# Altium PCB v0.2.PcbDoc
Units mil, origin at the board's own origin, x right, y up, seen from the top; angles counter-clockwise.
Board outline 2200 x 1320 mil, 4 copper layers (Top Layer, Signal Layer 1, Signal Layer 2, Bottom Layer), stack 30.634 mil thick; 74 components, 39 nets, 202 pads, 29 vias.
Unrouted connection lines stored in the file: 40.
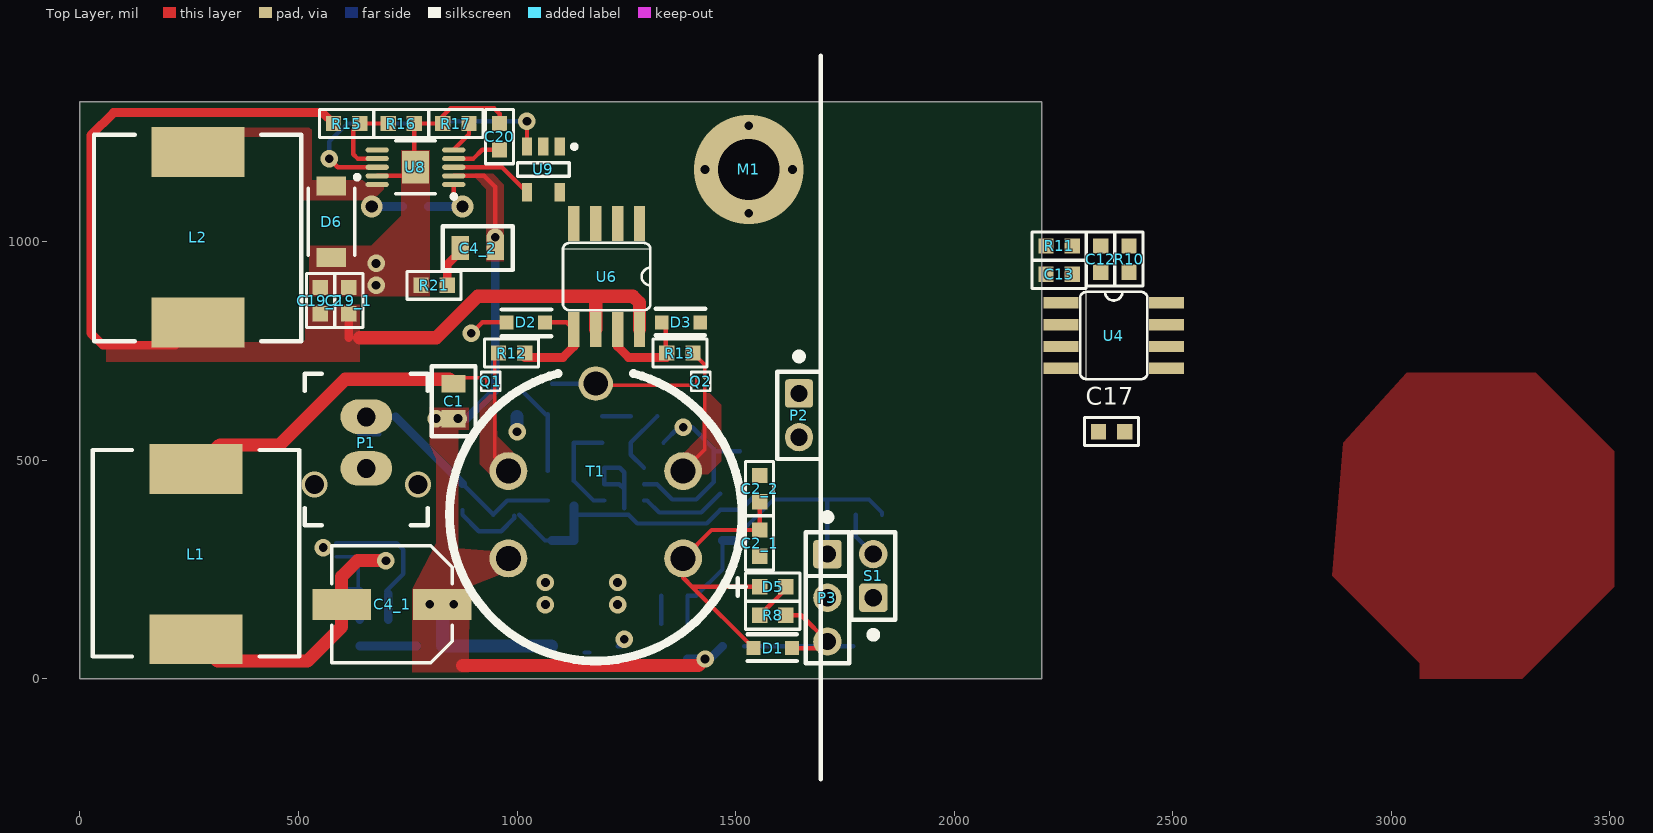
[diagram p0: Top Layer view]
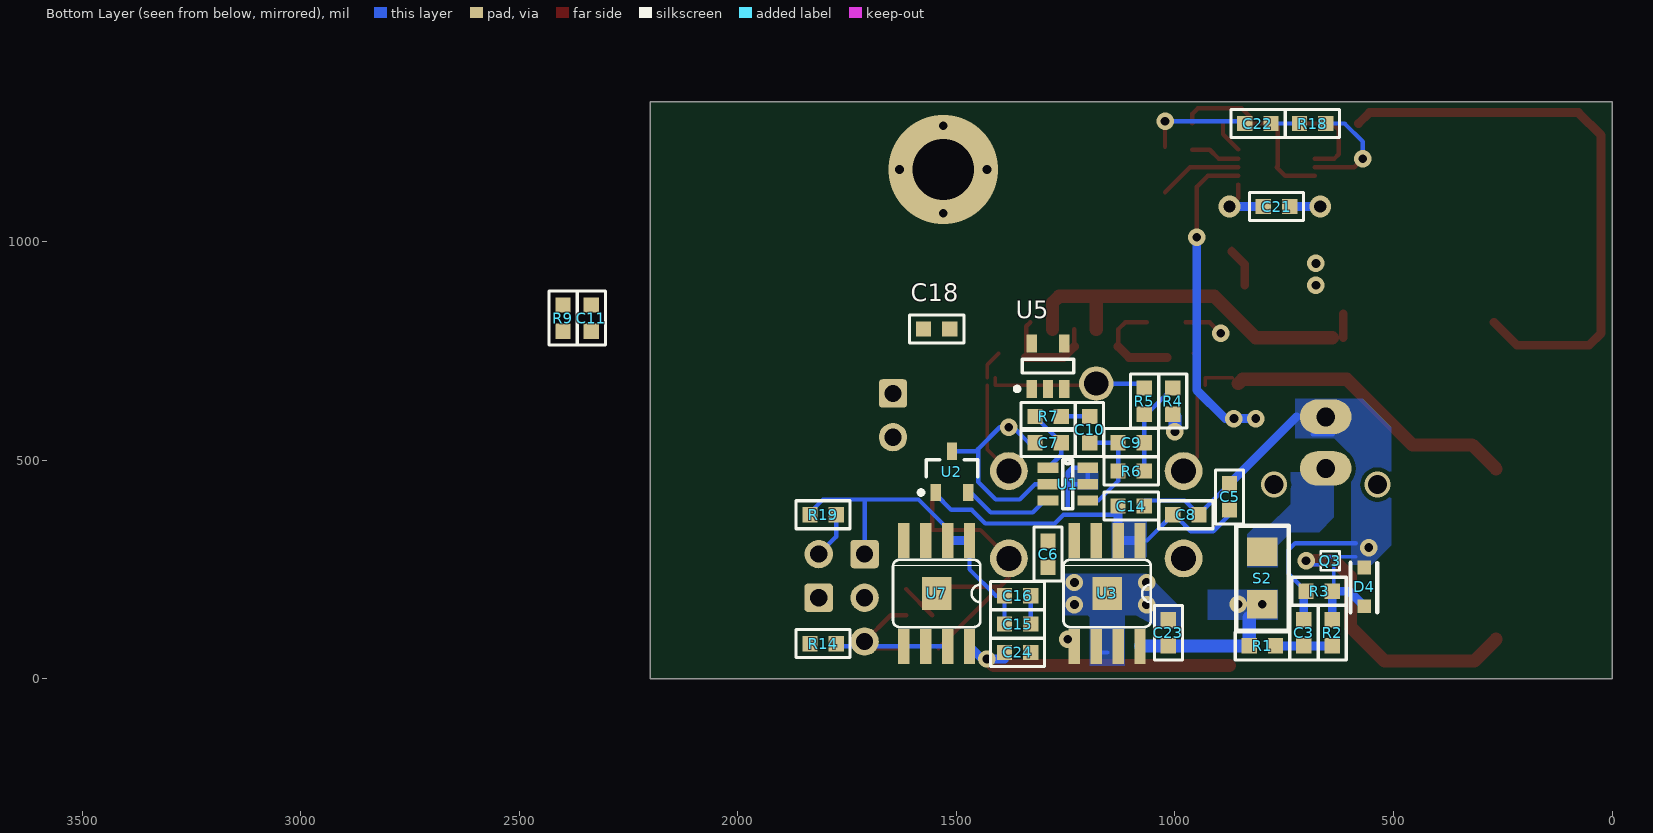
[diagram p1: Bottom Layer view, seen from below]
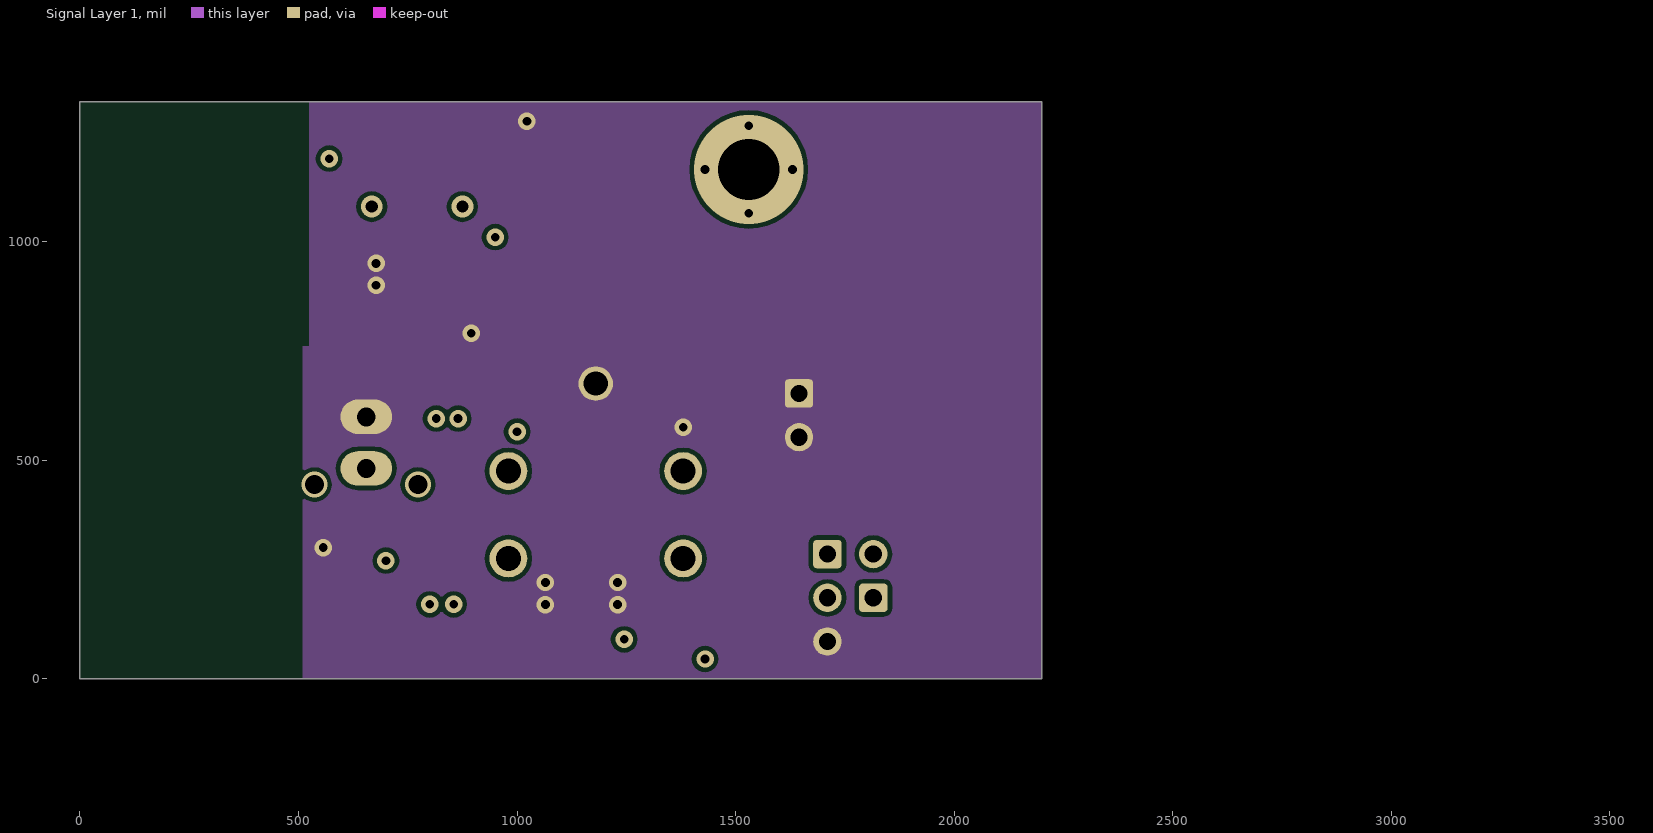
[diagram p2: Signal Layer 1]
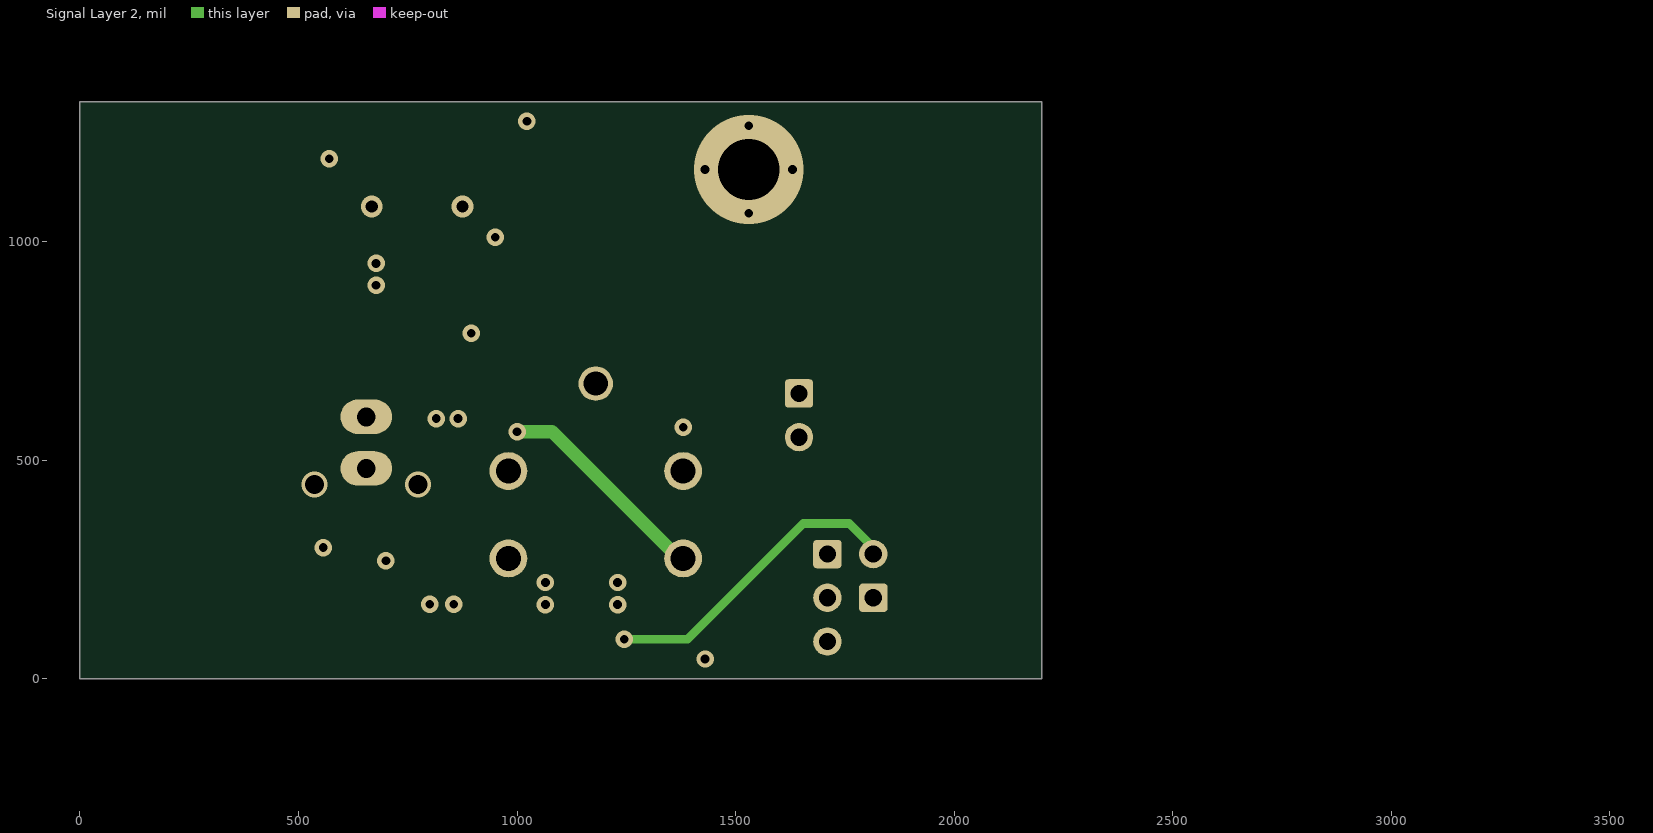
[diagram p3: Signal Layer 2]

## Layer stack, top to bottom
Top Solder: solder mask 0.4, Solder Resist, Dk 3.5
Top Layer: signal copper 1.4
Dielectric 1: core 10, FR-4, Dk 4.2
Signal Layer 1: signal copper 1.417
Dielectric 3: prepreg 5, Dk 4.2
Signal Layer 2: signal copper 1.417
Dielectric 2: core 10, Dk 4.2
Bottom Layer: signal copper 1.4
Bottom Solder: solder mask 0.4, Solder Resist, Dk 3.5

## Board outline
0,0 0,1320 2200,1320 2200,0

## Design rules (kind name [scope] priority, off if disabled: settings)
Clearance [All] p1: gap=10 ignorepadtopadclearanceinfootprint=FALSE except(0: Arc-Hole Track-Hole SMDPad-Hole THPad-Hole Via-Hole Fill-Hole Poly-Hole Region-Hole Text-Hole)
PolygonConnect [All] p1: connectstyle=Direct reliefconductorwidth=10 reliefentries=4 polygonreliefangle="90 Angle" airgapwidth=10
RoutingVias [All] p1: holewidth=28 width=50 viastyle="Through Hole" minholewidth=28 minwidth=50 maxholewidth=28 maxwidth=50
SilkToSilkClearance [All] p1 off: silktosilkclearance=10
SolderMaskExpansion [All] p1: expansion=4
Width [All] p1: maxlimit=50 minlimit=8 preferedwidth=10 midlayer1_minwidth=10 midlayer2_minwidth=10 minimp=50.000000 maximp=50.000000 favimp=50.000000
29 further rules are at their usual default settings.

## Components (designator, comment, footprint, x,y, rotation, side; value= is the part's Value field where it differs from the comment)
C1 "TriCap" TRICAP_0805 855,635 r270 top locked value=1u
C2_1 "TriCap" TRICAP_0603 1555,310 r90 top value=10u
C2_2 "TriCap" TRICAP_0603 1555,435 r270 top value=10u
C3 "Cap" SMD0603_CAP 705,105 r270 bottom value=100n
C4_1 "Cap" CAP_RADIAL_D 713.86,170 r180 top value=10u
C4_2 "TriCap" tricap_0805 910,985 r0 top value=1u
C5 "Cap" SMD0603_CAP 875,415.75 r90 bottom value=2.2u
C6 "Cap" SMD0603_CAP 1290.28,285 r270 bottom value=2.2u
C7 "Cap" SMD0603_CAP 1290.28,540 r0 bottom value=330p
C8 "Cap" SMD0603_CAP 975,375 r180 bottom value=10n
C9 "Cap" SMD0603_CAP 1100,540 r0 bottom value=500p
C10 "Cap" SMD0603_CAP 1195,570 r270 bottom value=440p
C11 "Cap" SMD0603_CAP 2335,825 r270 bottom value=330p
C12 "Cap" SMD0603_CAP 2335,960 r90 top value=330p
C13 "Cap" SMD0603_CAP 2240,925 r0 top value=1n
C14 "Cap" SMD0603_CAP 1100,395 r180 bottom value=10n
C15 "Cap" SMD0603_CAP 1360,125 r180 bottom value=2.2u
C16 "Cap" SMD0603_CAP 1360,190 r180 bottom value=10n
C17 "Cap" SMD0603_CAP 2360,565 r0 top value=10n
C18 "Cap" SMD0603_CAP 1545,800 r180 bottom value=10n
C19_1 "TriCap" TRICAP_0603 615,865 r270 top value=10u
C19_2 "TriCap" TRICAP_0603 550,865 r270 top value=10u
C20 "Cap" SMD0603_CAP 960,1240 r90 top value=100n
C21 "Cap" SMD0603_CAP 767.6,1080 r180 bottom value=100n
C22 "Cap" SMD0603_CAP 810,1270 r0 bottom value=4.7n
C23 "Cap" SMD0603_cap 1015,105 r270 bottom value=100n
C24 "Cap" SMD0603_cap 1360,60 r0 bottom value=100n
D1 "Zener" SOD-323F 1585,70 r180 top
D2 "Zener" SOD-323F 1020,815 r0 top
D3 "Zener" SOD-323F 1375,815.12 r180 top
D4 "Zener" SOD-323F 566.89,210 r270 bottom
D5 "LED" "SMD0603 POLARIZED" 1585,210 r0 top
D6 "Shottky" SOD-128 575,1045 r270 top
L1 "Inductor" NONSTANDARD_10UH 265,285 r180 top value=10u
L2 "Inductor" NONSTANDARD_68UH 270,1010 r0 top value=68u
M1 "MountHole" MOUNTHOLE_M3 1530,1165 r0 top
P1 "Microfit 2x1" "MICROFIT 2X1" 655,540 r180 top
P2 "Header" "HEADER 2X1" 1645,652.5 r270 top
P3 "Header" "HEADER 3X1" 1710,285 r270 top
Q1 "GaN PowerFET" "GaN Bumped Die" 940,680 r270 top
Q2 "GaN PowerFET" "GAN BUMPED DIE" 1420,680 r270 top
Q3 "GaN PowerFET" "GaN Bumped Die" 645,270 r0 bottom
R1 "Res" SMD0603 800,75 r0 bottom value=200k
R2 "Res" SMD0603 640,105 r270 bottom value=200k
R3 "Res" SMD0603 670,200 r0 bottom value=23.7k
R4 "Res" SMD0603 1005,635 r90 bottom value=73.2k
R5 "Res" SMD0603 1070,635 r90 bottom value=23.7k
R6 "Res" SMD0603 1100,475 r180 bottom value=1M
R7 "Res" SMD0603 1290.28,600 r180 bottom value=200k
R8 "Res" SMD0603 1585,145 r0 top value=2.2k
R9 "Res" SMD0603 2400,825 r90 bottom value=21k
R10 "Res" SMD0603 2400,960 r90 top value=1k
R11 "Res" SMD0603 2240,990 r180 top value=3.3k
R12 "Res" SMD0603 987.5,745 r180 top value=100
R13 "Res" SMD0603 1372.5,745 r0 top value=100
R14 "Res" SMD0603 1805,80 r180 bottom value=0
R15 "Res" SMD0603 610,1270 r180 top value=200k
R16 "Res" SMD0603 735,1270 r180 top value=36k
R17 "Res" SMD0603 860,1270 r0 top value=200k
R18 "Res" SMD0603 685,1270 r180 bottom value=22k
R19 "Res" SMD0603 1805,375 r180 bottom value=200k
R21 "Res" SMD0603 810,900 r180 top value=1
S1 "Header" "Header 2x1" 1815,185 r90 top
S2 "Fuse_SMD" smd1206 800,230 r270 bottom
T1 "Transformer" P1408 1180,375 r90 top locked
U1 "OPA835" SOT23-6L 1245,445 r180 bottom
U2 "MAX6101" SOT23 1510,473.13 r90 bottom
U3 "RT9068" SOIC-8_PAD 1155,195 r0 bottom
U4 "555" SOIC8 2365,785 r270 top
U5 "MCP6541U" SOT23-5LEAD 1290.28,715 r90 bottom
U6 "LM5110-3M" SOIC8 1205,920 r180 top
U7 "RT9068" SOIC-8_PAD 1545,195 r0 bottom
U8 "TPS54260" MSSOP-10 767.6,1170 r180 top
U9 "NC7SZ04" SOT23-5LEAD 1060,1165 r270 top

## Footprints (in the part's own frame and the unit in brackets; to place one, negate y for a bottom-side part, rotate by r counter-clockwise, add the part's x,y. Pads: shape width x height; smd on the part's side, far side on the other; paste and mask are expansions set on the pad)
CAP_RADIAL_D [mm] "Aluminum Electrolytic Capacitor, Body 7.00x6.60x6.10mm, IPC Low Density"
  rect 3.4x1.8 smd: 1(-2.925,0) 2(2.925,0)
  silkscreen extent -3.5,-3.4 3.5,3.4, body extent -3.87,-3.4 3.88,3.4, height 6.1
"GaN Bumped Die" [mm] "4-Lead"
  round 0.21 smd: D(0.225,0.225) G(-0.225,0.225) S(-0.225,-0.225) S(0.225,-0.225)
  silkscreen extent -0.55,-0.55 0.55,0.55, body extent -0.71,-0.55 0.54,0.55, height 1.35
"GAN BUMPED DIE" [mm] "4-Lead"
  round 0.21 smd: D(0.225,0.225) G(-0.225,0.225) S(-0.225,-0.225) S(0.225,-0.225)
  silkscreen extent -0.55,-0.55 0.55,0.55, body extent -0.71,-0.55 0.54,0.55, height 1.35
"HEADER 2X1" [mil] "PinHeader 1x2 TH Pitch 2.54mm"
  rrect25% 65x65 hole 39.37: 1(0,0)
  round 65 hole 39.37: 2(100,0)
  silkscreen extent -91,-50 150,50, body extent -50,-50 150,50, height 374
"Header 2x1" [mil] "PinHeader 1x2 TH Pitch 2.54mm"
  rrect25% 65x65 hole 39.37: 1(0,0)
  round 65 hole 39.37: 2(100,0)
  silkscreen extent -91,-50 150,50, body extent -50,-50 150,50, height 374
"HEADER 3X1" [mil] "PinHeader 1x3 TH Pitch 2.54mm"
  rrect25% 65x65 hole 39.37: 1(0,0)
  round 65 hole 39.37: 2(100,0) 3(200,0)
  silkscreen extent -91,-50 250,50, body extent -50,-50 250,50, height 374
"MICROFIT 2X1" [mm]
  oval 3x2 hole 1.1: 1(0,1.5) 2(0,-1.5)
  silkscreen extent -3.58,-4 3.58,4.8, body extent -3.57,-3.97 3.58,7, height 17.6
MOUNTHOLE_M3 [mil]
  body extent -104,-100 104,109, height 71
MSSOP-10 [mm] "TSSOP, 10-Leads, Body 3.00x3.00mm, Pitch 0.50mm, Thermal Pad 1.88x1.57mm, IPC Medium Density"
  oval 1.35x0.3 smd: 1(-2.225,1) 2(-2.225,0.5) 3(-2.225,0) 4(-2.225,-0.5) 5(-2.225,-1) 6(2.225,-1) 7(2.225,-0.5) 8(2.225,0) 9(2.225,0.5) 10(2.225,1)
  rect 1.57x1.88 smd: 11(0,0)
  silkscreen extent -2.35,-1.55 1.15,1.82, body extent -2.45,-1.55 2.45,1.55, height 1.1
NONSTANDARD_10UH [mm]
  rect 5.4x2.9 smd: 1(0,4.95) 2(0,-4.95)
  silkscreen extent -6.02,-6.05 5.99,5.95, body extent -6,-6.05 6,5.95, height 5.97
NONSTANDARD_68UH [mm]
  rect 5.4x2.9 smd: 1(0,4.95) 2(0,-4.95)
  silkscreen extent -6.05,-6.05 5.99,5.95, body extent -6,-6.05 6,5.95, height 9.45
P1408 [mm]
  round 2.2 hole 1.45: 1(-2.54,5.08) 3(2.54,5.08) 4(2.54,-5.08) 6(-2.54,-5.08)
  round 2 hole 1.4: 5(7.62,0)
  silkscreen extent -8.5,-8.5 8.21,8.5, body extent -8.2,-8.2 8.2,8.2, height 12
SMD0603 [mil]
  rect 35x35 smd: 1(-30,0) 2(30,0)
  silkscreen extent -62,-32 62,32, body extent -31,-16 31,16, height 18
"SMD0603 POLARIZED" [mil]
  rect 35x35 smd: 1(-30,0) 2(30,0)
  silkscreen extent -100,-32 62,32, body extent -31,-16 32,16, height 18
SMD0603_CAP [mil]
  rect 35x35 smd: 1(-30,0) 2(30,0)
  silkscreen extent -62,-32 62,32, body extent -37,-22 30,14, height 35
SMD0603_cap [mil]
  rect 35x35 smd: 1(-30,0) 2(30,0)
  silkscreen extent -62,-32 62,32, body extent -37,-22 30,14, height 35
smd1206 [mil]
  rect 65x70 smd: 1(-60,0) 2(60,0)
  silkscreen extent -120,-60 120,60, body extent -61,-30 61,31, height 22
SOD-128 [mm] "SODFL, 2-Leads, Body 2.50x4.70mm, IPC Medium Density"
  rect 1.1x1.7 smd: A(2.075,0) K(-2.075,0)
  silkscreen extent -2.72,-1.35 1.95,1.63, body extent -2.6,-1.35 2.6,1.35, height 1.11
SOD-323F [mm]
  rect 0.8x0.8 smd: A(-1.12,0) K(1.12,0)
  silkscreen extent -1.4,-0.8 1.47,0.75, body extent -1.38,-0.77 1.48,0.73, height 1.12
SOIC8 [mil]
  rect 26x80 smd mask+3: 1(-75,-121) 2(-25,-121) 3(25,-121) 4(75,-121) 5(75,121) 6(25,121) 7(-25,121) 8(-75,121)
  silkscreen extent -100,-77 100,77, body extent -96,-118 96,118, height 69
SOIC-8_PAD [mil]
  rect 26x80 smd mask+3: 1(-75,-121) 2(-25,-121) 3(25,-121) 4(75,-121) 5(75,121) 6(25,121) 7(-25,121) 8(-75,121)
  rect 66.93x74.8 smd: 9(0,0)
  silkscreen extent -100,-77 100,77, body extent -96,-118 96,118, height 69
SOT23 [mm] "SOT23, 3-Leads, Body 2.90x2.45mm, Pitch 0.95mm, IPC Medium Density"
  rect 1x0.6 smd: 1(-1.2,0.95) 2(-1.2,-0.95) 3(1.2,0)
  silkscreen extent -1.32,-1.5 0.7,1.93, body extent -1.26,-1.49 1.29,1.51, height 1
SOT23-5LEAD [mm] "SOT23, 5-Leads, Body 2.95x2.80mm, Pitch 0.95mm, IPC Medium Density"
  rect 1.05x0.6 smd: 1(-1.325,0.95) 2(-1.325,0) 3(-1.325,-0.95) 4(1.325,-0.95) 5(1.325,0.95)
  silkscreen extent -1.45,-1.5 0.4,1.93, body extent -1.66,-1.5 1.55,1.5, height 0.92
SOT23-6L [mm] "ESDA6V1BC6"
  rect 1.2x0.6 smd: 1(-1.15,0.95) 2(-1.15,0) 3(-1.15,-0.95) 4(1.15,-0.95) 5(1.15,0) 6(1.15,0.95)
  silkscreen extent -0.28,-1.43 0.28,1.43, body extent -1.42,-1.51 1.42,1.41, height 1.1
TRICAP_0603 [mil]
  rect 35x35 smd: 1(-30,0) 2(30,0)
  silkscreen extent -62,-32 62,32, body extent -33,-18 33,18, height 106
TRICAP_0805 [mil]
  rect 40x55 smd: 1(-40,0) 2(40,0)
  silkscreen extent -80,-50 80,50, body extent -41,-27 41,27, height 159
tricap_0805 [mil]
  rect 40x55 smd: 1(-40,0) 2(40,0)
  silkscreen extent -80,-50 80,50, body extent -41,-27 41,27, height 159

## Part data
C3 C5 C6 C7 C8 C9 C10 C11 C12 C13 C14 C15 C16 C17 C18 C20 C21 C22 C23 C24: library part "Capacitor Ceramic", "Ceramic Chip Capacitor"
C4_1: library part "Capacitor Polarized", "Polarized Capacitor (Surface Mount)"
P2 S1: library part "Header 2x1", "Header, 2-Pin"
P3: library part "Header 3x1", "Header, 2-Pin"
R1 R2 R3 R4 R5 R6 R7 R8 R9 R10 R11 R12 R13 R14 R15 R16 R17 R18 R19 R21: library part Resistor, "Resistor"
L1 L2: Code_IEC=1005, Code_JEITA=0402, LatestRevisionDate=29-May-2009, LatestRevisionNote="IPC-7351 Footprint Added.", PackageDescription="Chip Inductor", PackageReference=0402-A, Published=8-Jun-2000, Publisher="Altium Limited"

## Via types
v1: diameter 40, hole 20, Top Layer to Bottom Layer, 24 vias
v2: diameter 50, hole 28, Top Layer to Bottom Layer, 2 vias
v3: diameter 59.06, hole 43.31, Top Layer to Bottom Layer, 2 vias
v4: diameter 250, hole 140, Top Layer to Bottom Layer, 1 vias

## Nets (pads, with @x,y where several pads share a name; then routed paths per layer and width w, separated by ;. In a path a pad name is that pad's centre, name@x,y a point inside that pad or via, vN(x,y) a via of type N, cw(c..) or ccw(c..) an arc to the next point about the centre after c; other vN are vias at no path point)
1v25: C6.1 U1.3 U2.2 | length 204.1
  Bottom Layer w10: U1.3 1297.4,407.6 1325,380 1421.59,380 U2.2@1465,423.41
5v0: C5.1 C8.1 C14.1 C17.1 C18.1 U1.5 U1.6 U2.1 U3.1 U3.2 U4.4 U4.8 U5.5 | length 1067.9
  Bottom Layer w10: C5.1 875,375 912.5,337.5 963.71,337.5 993.11,366.89 C8.1@993.11,373.11 ; C8.1 1064,316 U3.1 ; 1130,375 1255,375 1275,355 1433.86,355 1465,386.14 1511.73,386.14 1547.4,421.81 U2.1 ; 1245,390 1245,433.62 ; 1245,433.62 1233.62,445 U1.5 U1.6 1235.02,482.4 1245,472.42 1245,433.62
  Bottom Layer w20: U3.1 U3.2 1130,375 C14.1
GND: C2_1.1 C2_2.1 C3.1 C5.2 C6.2 C7.2 C8.2 C11.1 C12.1 C13.2 C14.2 C15.2 C16.2 C17.2 C18.2 C19_1.1 C19_2.1 C20.2 C22.2 C23.1 C24.1 D1.A D2.A D3.A D4.A D6.A P1.2 P2.2 P3.3 Q2.S Q3.S R3.2 R5.2 R8.2 R14.2 R16.1 R17.1 R21.2 T1.5 U1.2 U2.3 U3.6 U3.7 U3.9 U4.1 U5.2 U6.1 U6.3 U7.5 U7.6 U7.7 U7.9 U8.9 U8.11 U9.3 | length 3027.8
  Top Layer w8: T1.5@1183.86,671.14 1411.14,671.14 Q2.S@1411.14,688.86
  Top Layer w10: U8.9 747.91,1150.31 U8.11 ; U8.11@765,1172.6 R16.1 R17.1 830,1287.36 847.64,1305 947.5,1305 960,1292.5 C20.2 ; v1(895,790) 920.12,815.12 D2.A@975.91,815.12 ; U9.3 v1(1022.6,1275) ; R8.2 1650,145 P3.3 1695,70 D1.A
  Bottom Layer w8: 586.14,278.86 636.14,278.86 Q3.S@653.86,278.86
  Bottom Layer w10: 586.14,310 725,310 740,295 740,240 R3.2 ; 639.06,559.06 685,559.06 ; C22.2 845,1275 v1(1022.6,1275) ; C5.2 945.37,375.37 977.6,407.6 C14.2@1070,407.6 ; R5.2@1080,675 T1.5 ; 1155,60 1165,60 ; U1.2 1320,445 1355,410 1410,410 1450,450 1450,525.57 ; C15.2 C16.2 ; C7.2@1335,540 1370,575 v1(1380,575) 1400.57,575 1450,525.57 ; U2.3 1455.2,520.37 1450,525.57 ; U7.7 U7.6 U7.5 R14.2@1769,74
  Bottom Layer w20: C3.1 R3.2@705,194.43 ; 721.69,599.06 C5.2
  other v1: 1065,169.43 1230,169.43 1065,220 1230,220 556.82,300 677.5,900 677.5,950
NetC1_1: C1.1 L1.2 Q1.S | length 759.1
  Top Layer w8: C1.1@868.86,688.86 931.14,688.86 Q1.S@931.14,671.14
  Top Layer w30: L1.2 320.12,535 456.89,535 606.89,685 845,685 C1.1
NetC3_2: C3.2 R1.1 R2.2 | length 130
  Bottom Layer w20: R2.2 C3.2 R1.1
NetC4_1_2: C4_1.2 L1.1 Q3.D | length 668.2
  Top Layer w30: L1.1 315.12,40 520,40 598.7,118.7 C4_1.2 598.7,233.7 635,270 v1(700,270)
  Bottom Layer w8: Q3.D v1@691.14,261.14
  Bottom Layer w10: v1@691.14,261.14 v1(700,270)
NetC4_2_1: C4_2.1 R21.1 | length 99.8
  Top Layer w8: C4_2.1@870,977.36 C4_2.1
  Top Layer w10: C4_2.1@870,975 C4_2.1@870,977.36
  Top Layer w20: R21.1 840,947.36 C4_2.1@870,977.36
NetC9_1: C9.1 R4.2 R5.1 R6.2 | length 214.9
  Bottom Layer w10: R4.2 R5.1@1065,605 ; R6.2 C9.1 R5.1
NetC9_2: C9.2 C10.2 R6.1 U1.4 | length 240.9
  Bottom Layer w10: C10.2 C9.2 R6.1 1130,452.35 1174.75,407.6 U1.4
NetC10_1: C10.1 R7.2 | length 65.3
  Bottom Layer w10: C10.1 R7.2
NetC11_2: C11.2 R9.1 U4.2 U4.6
NetC12_2: C12.2 R10.2 R11.1
NetC20_1: C20.1 U8.4 | length 112.8
  Top Layer w10: U8.4 899.8,1189.69 ; 900.12,1190 920.12,1210 C20.1
NetC21_1: C21.1 U8.1 | length 136.1
  Top Layer w10: U8.1 855.2,1099.69 v2(874.88,1080)
  Bottom Layer w20: C21.1 v2(874.88,1080)
NetC21_2: C21.2 D6.K L2.1 U8.10 | length 70
  Bottom Layer w20: v2(667.6,1080) C21.2
NetC22_1: C22.1 R18.1 | length 65
  Bottom Layer w10: R18.1 C22.1
NetD4_K: D4.K Q3.G R2.1 R3.1 | length 215
  Bottom Layer w8: R3.1@636.14,203.86 Q3.G
  Bottom Layer w10: R3.1@636.14,203.86 R3.1
  Bottom Layer w20: D4.K 600.98,200 R3.1 R2.1
NetD5_2: D5.2 R8.1 | length 84.9
  Top Layer w10: R8.1 D5.2@1615,205
NetP1_1: P1.1 S2.1
NetP3_2: P3.2 R14.1 S1.1
NetQ1_D: Q1.D T1.3 | length 209
  Top Layer w8: Q1.D 948.86,506.14 T1.3
NetQ1_G: Q1.G R12.2 | length 59.7
  Top Layer w8: Q1.G 948.86,736.36 R12.2
NetQ2_D: Q2.D T1.4 | length 216.4
  Top Layer w8: T1.4 1428.86,523.86 Q2.D
NetQ2_G: Q2.G R13.2 | length 67.1
  Top Layer w8: R13.2 1428.86,718.64 Q2.G
NetR15_1: R15.1 R16.2 U8.7 | length 200
  Top Layer w10: 635,1190 625,1200 625,1255 R15.1 R16.2 ; 635.32,1189.69 U8.7
NetR17_2: R17.2 U8.5 | length 73.8
  Top Layer w10: U8.5@855.2,1210.59 890,1245.39 R17.2
NetR18_2: R18.2 U8.8 | length 259
  Top Layer w10: v1(570,1189.69) 589.68,1170 U8.8
  Bottom Layer w10: v1(570,1189.69) 570,1228.18 611.82,1270 R18.2
PD: R19.2 S1.2 U3.5 U9.2 | length 833.1
  Signal Layer 2 w20: v1(1245,90) 1390,90 1655,355 1760,355 1815,300 S1.2
  Bottom Layer w10: U3.5 U3.5@1239,74 ; R19.2 1775,325 S1.2
PDbar: U8.3 U9.4 | length 191.1
  Top Layer w10: U8.3 965.43,1170 U9.4
V555: R9.2 R10.1 U4.3
VBAT: C1.2 C4_1.1 C4_2.2 C23.2 C24.2 R1.2 S2.2 T1.1 U3.8 U7.8 U8.2 | length 1724.4
  Top Layer w10: U8.2 924.69,1150.31 ; 924.69,1150 925,1150 950,1125 v1(950,1010) C4_2.2
  Top Layer w30: 874.88,30 1415,30 v1(1430,45)
  Bottom Layer w20: v1(815,595) v1(865,595) 885,595 950,660 v1(950,1010) ; C24.2@1390,45 v1(1430,45) 1441,45 U7.8
  Bottom Layer w30: S2.2@830,140 R1.2 C23.2 U3.8@1079,75
  other v1: 800,170 855,170
Vbuck: C19_1.2 C19_2.2 L2.2 R15.2 U6.6 U6.8 | length 2199.8
  Top Layer w20: L2.2 217.38,762.5 52.5,762.5 25,790 25,1243.05 76.95,1295 555,1295 R15.2 ; 615,780 C19_1.2 ; 1170,875 1180,865
  Top Layer w30: 640,780 815,780 910,875 1170,875 1265,875 1280,860 U6.8 ; U6.6 1180,865
Vcmp: U5.4 U6.2 U6.4
Vconst5: C15.1 C16.1 P3.1 R19.1 U7.1 U7.2 U9.5 | length 798.2
  Bottom Layer w10: C15.1 C16.1 1410,190 1470,250 U7.1 ; U7.2 1520,343.34 1586.66,410 1710,410 ; P3.1 1710,410 ; R19.1 1835,380 1805,410 1710,410
  Bottom Layer w20: U7.1 U7.2
Vopa: C7.1 R7.1 U1.1 U5.1 | length 154.9
  Bottom Layer w10: U1.1 1260.28,512.4 C7.1 R7.1
VOUT: C2_1.2 C2_2.2 D1.K D5.1 P2.1 R4.1 T1.6 | length 1227.8
  Top Layer w10: D1.K 1400.91,210 ; D5.1 1400.91,210 ; C2_2.2 C2_1.2 1445,340 T1.6 1380,230.91 1400.91,210
  Signal Layer 2 w30: v1(1000,565) 1080,565 1370,275 T1.6
  Bottom Layer w30: v1(1000,565) R4.1@1000,600
Vq1: D2.K R12.1 U6.5 | length 234.4
  Top Layer w10: D2.K@1064.09,815.12 1113.88,815.12 U6.5 U6.5@1130,760
  Top Layer w20: R12.1@1017.5,735 1105,735 U6.5@1130,760
Vq2: D3.K R13.1 U6.7 | length 233.2
  Top Layer w10: U6.7@1230,760 U6.7 ; D3.K 1340,806.02 R13.1@1340,747.5
  Top Layer w20: U6.7@1230,760 1255,735 R13.1@1342.5,735
Vtri: C13.1 R11.2 U5.3
pads on no net: U3.3 U3.4 U4.5 U4.7 U7.3 U7.4 U8.6 U9.1
copper on no net:
  other v1: 1530,1065 1430,1165 1630,1165 1530,1265
  other v3: 536.89,443.94 773.11,443.94
  other v4: 1530,1165

## Polygon pours and split planes (outlines as drawn)
VBAT on Top Layer "vbat_1" (solid, remove dead copper, pour order 16): 800,620 865,620 865,297.79 965.91,290 965.91,240 890.06,210.7 889.9,15 760,15 760,205 815,310 815,503.12 800,535
VBAT on Top Layer "vbat_11" (solid, pour order 46): 815,620 890,620 890,570 815,570
NetQ2_D on Top Layer "q2_d1" (solid, remove dead copper, pour order 44): 1427.5,652.5 1441.36,652.5 1467.5,626.36 1467.5,497.5 1437.5,467.5 1367.5,467.5 1367.5,502.5 1422.5,557.5
NetQ1_D on Top Layer "q1_d1" (solid, remove dead copper, pour order 42): 950,650 936.14,650 915,628.86 915,490 940,465 1010,465 1010,500 955,555
no net on Top Layer "none" (solid, pour order 40): 3330,700 3510,520 3510,210 3300,0 3065,0 3065,35.76 2865.38,235.38 2890.06,540 3035,700
GND on Top Layer "gnd_bottom" (solid, remove dead copper, pour order 12): 800,1209.37 735,1209.37 735,1058.54 666.46,990 525,990 525,880 530,875 800,875 800,960
VBAT on Top Layer "gnd_bottom" (solid, remove dead copper, pour order 10): 970,955 930,955 930,1120 905,1145 905,1155 945,1155 970,1130
NetC21_2 on Top Layer "gnd_bottom" (solid, remove dead copper, pour order 8): 695,1120 670,1095 510,1095 510,1140 695,1140
Vbuck on Top Layer "gnd_bottom" (solid, remove dead copper, pour order 6): 640,855 640,725 60,725 60,770 510,770 515,775 515,855
NetC21_2 on Top Layer "gnd_bottom" (solid, remove dead copper, pour order 4): 525,1260.63 530,1255.47 530,1130 510,1130 510,1240 325.75,1240 325.75,1260.63
no net on Top Layer "gnd_bottom" (solid, remove dead copper, pour order 2): 1470,210
5v0 on Bottom Layer "5v0_3" (solid, remove dead copper, pour order 52): 1065,360 1145,360 1145,275 1064,275
5v0 on Bottom Layer "5v0_12" (solid, pour order 50): 1175,475 1189.94,489.94 1239.51,481.79 1245,433.62 1175,433.62
GND on Bottom Layer "gnd_8" (solid, remove dead copper, pour order 48): 1035,115 980,115 980,155 1065,240 1255,240 1255,145 1240,145 1200,145 1195,140 1195,30 1115,30 1115,145 1090,145
GND on Bottom Layer "gnd_1" (solid, remove dead copper, pour order 22): 725,640 570,640 505,575 505,305.28 549.13,261.14 596.14,261.14 596.14,511.14 635,550 725,550
NetP1_1 on Bottom Layer "fuse1" (solid, remove dead copper, pour order 26): 636.14,472.13 636.14,368.86 670,335 735,335 765,305 765,255 835,255 835,330 820,345 789.41,345 735,399.41 735,472.13
no net on Bottom Layer "gnd_bottom" (solid, remove dead copper, pour order 24): 591.14,435.15
VBAT on Bottom Layer "vbat_2" (solid, remove dead copper, pour order 18): 765,203.86 925,203.86 925,135 765,135
GND on Signal Layer 1 "gnd_main" (solid, remove dead copper, pour order 38): 2200,1320 525,1320 525,760 510,760 510,535 510,0 830,0 1525,0 2200,0
no net on Signal Layer 1 "gnd_bottom" (solid, remove dead copper, pour order 36): 2200,1320

## Other copper
Bottom Layer:
  pour cut-out: -5,735 -5,1325 1045,1325 1045,1040 515,1040 515,735

## Silkscreen, mask and mechanical layers (free items; w line width, h text height)
Top Overlay:
  lines w10: 1695,-230 1695,1425